# Altium PCB Codec_board_V0.PcbDoc
Units mm, origin at the board's own origin, x right, y up, seen from the top; angles counter-clockwise.
Board outline 73.53 x 102.49 mm, 2 copper layers (Top Layer, Bottom Layer); 116 components, 71 nets, 404 pads, 53 vias.
Unrouted connection lines stored in the file: 28.
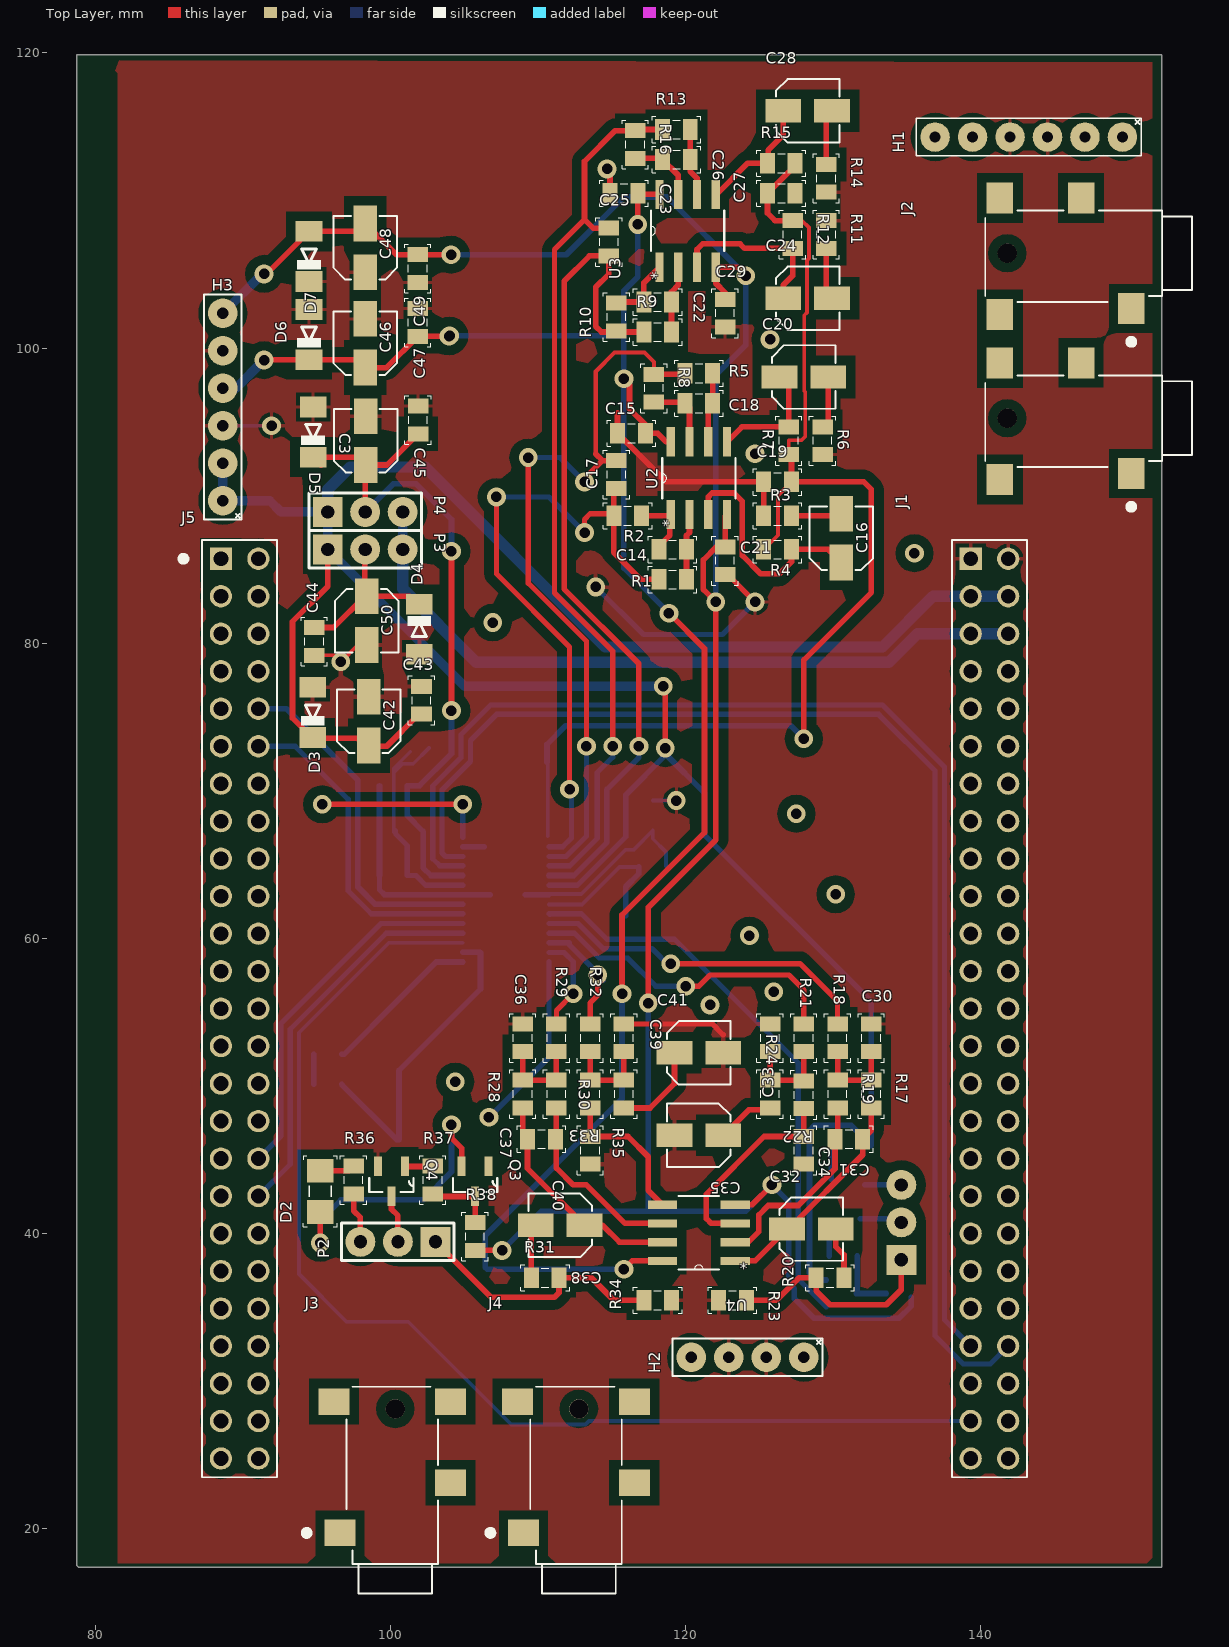
[diagram p0: Top Layer view]
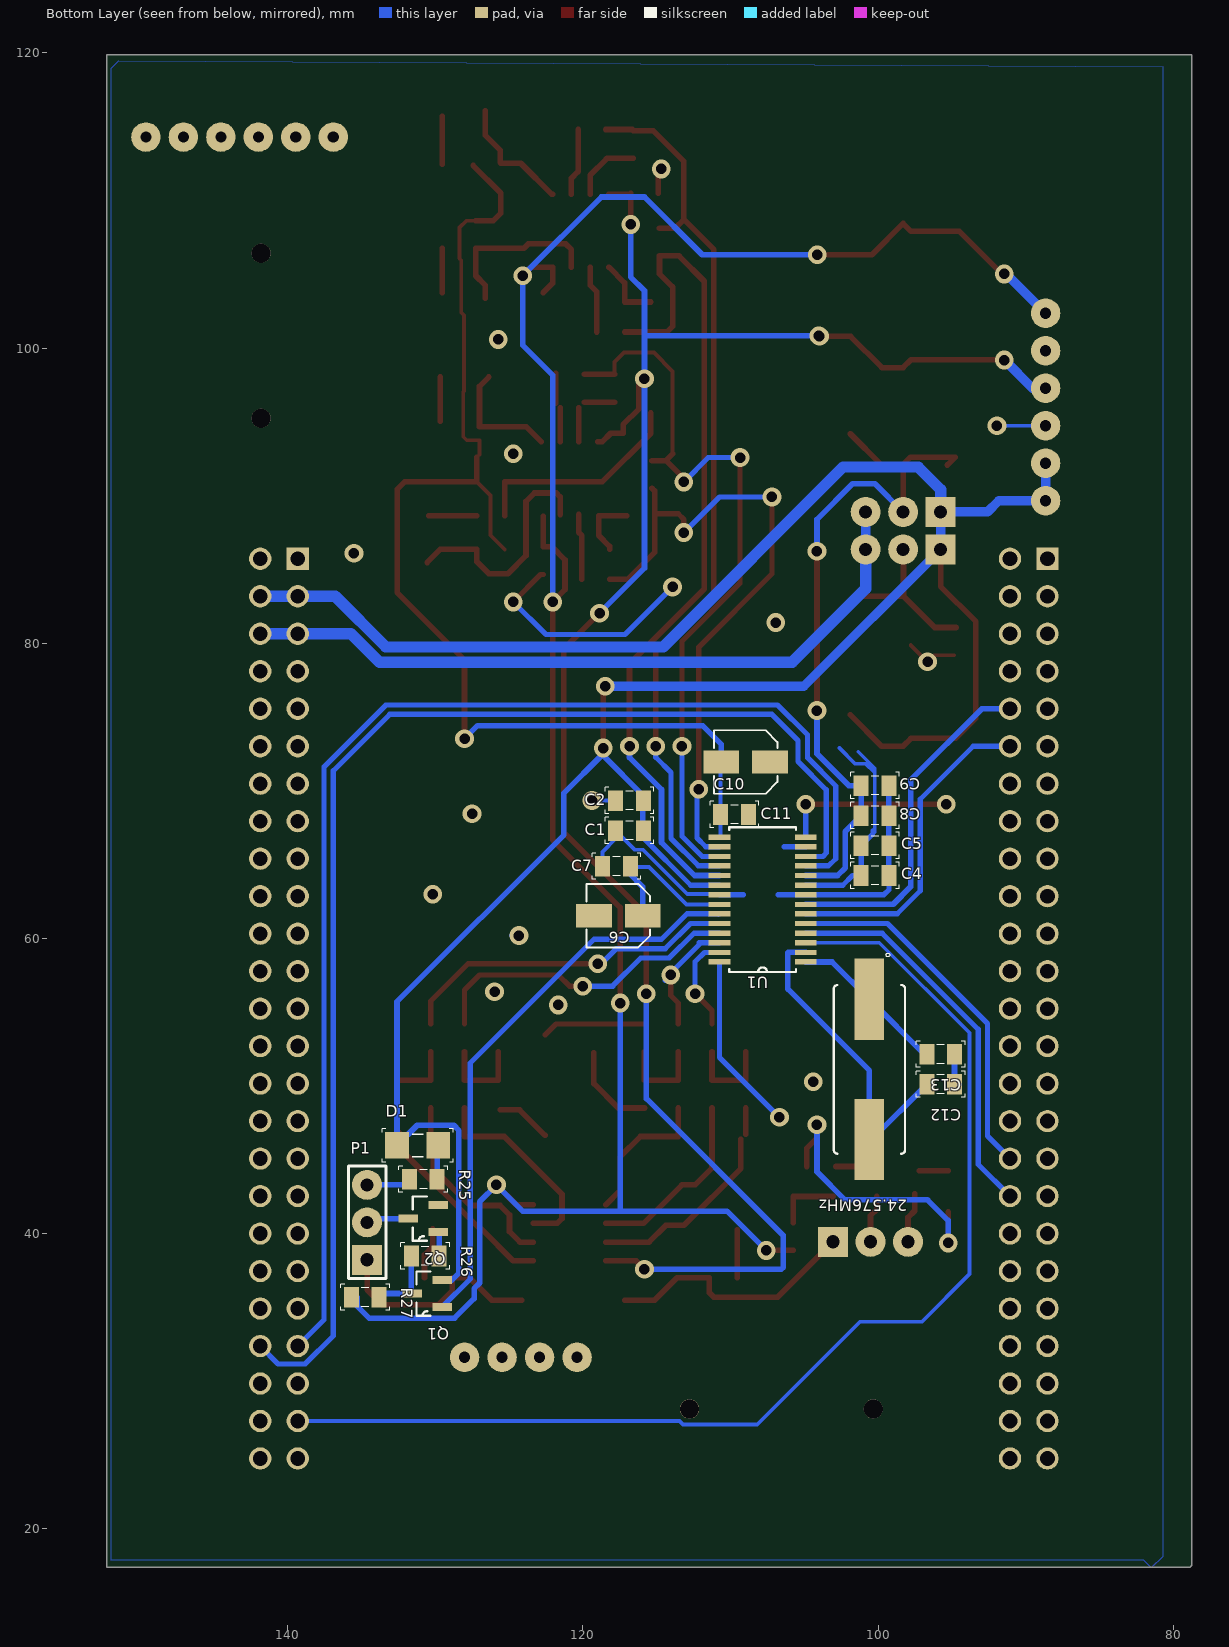
[diagram p1: Bottom Layer view, seen from below]

## Layer stack, top to bottom
Top Solder: solder mask 0.0102, Solder Resist, Dk 3.5
Top Layer: signal copper 0.0356
Dielectric 1: dielectric 0.32, FR-4, Dk 4.8
Bottom Layer: signal copper 0.0356
Bottom Solder: solder mask 0.0102, Solder Resist, Dk 3.5

## Board outline
78.74,17.526 78.867,17.399 152.273,17.399 152.273,119.888 78.74,119.888

## Design rules (kind name [scope] priority, off if disabled: settings)
Clearance [All] p1: gap=0.279 ignorepadtopadclearanceinfootprint=FALSE except(0: Arc-Hole Track-Hole SMDPad-Hole THPad-Hole Via-Hole Fill-Hole Poly-Hole Region-Hole Text-Hole; 0.635: Arc-Poly Track-Poly SMDPad-Poly THPad-Poly Via-Poly Fill-Poly Poly-Poly)
PolygonConnect [All] p1: connectstyle=Relief reliefconductorwidth=0.254 reliefentries=4 polygonreliefangle="90 Angle" airgapwidth=0.254
RoutingVias [All] p1: holewidth=0.711 width=1.27 viastyle="Through Hole" minholewidth=0.711 minwidth=1.27 maxholewidth=0.711 maxwidth=1.27
SilkToSilkClearance [All] p1 off: silktosilkclearance=0.254
SolderMaskExpansion [All] p1: expansion=0.102
Width [All] p1: maxlimit=0.762 minlimit=0.254 preferedwidth=0.381
29 further rules are at their usual default settings.

## Classes and differential pairs
component class Power: C3 C42 C43 C44 C45 C46 C47 C48 C49 C50 D3 D4 D5 D6 D7 H3 P3 P4
component class Output: C30 C31 C32 C33 C34 C35 C36 C37 C38 C39 C40 C41 D1 D2 H2 J3 J4 P1 P2 Q1 Q2 Q3 Q4 R17 R18 R19 R20 R21 R22 R23 R24 R25 R26 R27 R28 R29 R30 R31 R32 R33 R34 R35 R36 R37 R38 U4
component class Input: C14 C15 C16 C17 C18 C19 C20 C21 C22 C23 C24 C25 C26 C27 C28 C29 H1 J1 J2 R1 R2 R3 R4 R5 R6 R7 R8 R9 R10 R11 R12 R13 R14 R15 R16 U2 U3
component class Codec: 24.576MHz C1 C2 C4 C5 C6 C7 C8 C9 C10 C11 C12 C13 U1
component class Codec_board: J5

## Components (designator, comment, footprint, x,y, rotation, side; value= is the part's Value field where it differs from the comment)
24.576MHz "XTAL" XTAL_hc-49_smd 100.584,51.13 r270 bottom
C1 "0.1u" 0805_cap 116.84,67.31 r180 bottom
C2 "1u X7R" 0805_cap 116.84,69.342 r180 bottom
C3 "100u" "cap 4x5.4" 98.323,93.726 r90 top
C4 "0.1u" 0805_cap 100.203,64.262 r180 bottom
C5 "1u X7R" 0805_cap 100.203,66.294 r180 bottom
C6 "47u" "cap 4x5.4" 117.602,61.544 r0 bottom
C7 "0.1u" 0805_cap 117.729,64.897 r180 bottom
C8 "0.1u" 0805_cap 100.203,68.326 r0 bottom
C9 "1u X7R" 0805_cap 100.203,70.358 r0 bottom
C10 "0.1u" 0805_cap 109.728,68.402 r180 bottom
C11 "1u" "cap 4x5.4" 108.966,71.958 r0 bottom
C12 "39p C0G" 0805_cap 95.758,50.114 r0 bottom
C13 "39p C0G" 0805_cap 95.758,52.146 r0 bottom
C14 "470p C0G" 0805_cap 119.126,86.36 r0 top
C15 "0.01u X7R" 0805_cap 116.332,94.234 r0 top
C16 "10u" "cap 4x5.4" 130.556,87.122 r90 top
C17 "2700p C0G" 0805_cap 115.316,91.44 r90 top
C18 "470p C0G" 0805_cap 120.904,96.266 r0 top
C19 "0.01u X7R" 0805_cap 126.238,90.932 r0 top
C20 "10u" "cap 4x5.4" 128.016,98.044 r0 top
C21 "0.01u X7R" 0805_cap 122.682,85.598 r90 top
C22 "470p C0G" 0805_cap 118.11,103.124 r0 top
C23 "0.01u X7R" 0805_cap 115.824,110.49 r0 top
C24 "10u" "cap 4x5.4" 128.27,103.378 r0 top
C25 "2700p C0G" 0805_cap 114.808,107.188 r90 top
C26 "470p C0G" 0805_cap 119.38,112.776 r0 top
C27 "0.01u X7R" 0805_cap 126.492,110.49 r180 top
C28 "10u" "cap 4x5.4" 128.27,116.078 r0 top
C29 "0.01u X7R" 0805_cap 122.682,102.362 r90 top
C30 "2200p C0G" 0805_cap 132.588,53.264 r90 top
C31 "470p C0G" 0805_cap 131.064,46.406 r180 top
C32 "470u" "cap 4x5.4" 128.524,40.31 r0 top
C33 "6800p C0G" 0805_cap 125.73,53.264 r270 top
C34 "1500p C0G" 0805_cap 128.016,45.644 r90 top
C35 "22u" "cap 4x5.4" 120.904,46.66 r180 top
C36 "2200p C0G" 0805_cap 108.966,53.264 r90 top
C37 "470p C0G" 0805_cap 110.236,46.406 r0 top
C38 "470u" "cap 4x5.4" 111.506,40.564 r180 top
C39 "6800p C0G" 0805_cap 115.824,53.264 r270 top
C40 "1500p C0G" 0805_cap 113.538,45.644 r90 top
C41 "22u" "cap 4x5.4" 120.904,52.248 r0 top
C42 "100u" "cap 4x5.4" 98.531,74.728 r90 top
C43 "0.1u X7R" 0805_cap 102.108,76.136 r270 top
C44 "0.1u X7R" 0805_cap 94.844,80.125 r90 top
C45 "0.1u X7R" 0805_cap 101.879,95.135 r270 top
C46 "47u" "cap 4x5.4" 98.298,100.33 r90 top
C47 "0.1u X7R" 0805_cap 101.854,101.739 r270 top
C48 "47u" "cap 4x5.4" 98.298,106.795 r90 top
C49 "0.1u X7R" 0805_cap 101.854,105.387 r270 top
C50 "100u" "cap 4x5.4" 98.4,81.534 r270 top
D1 "LED_mute" 1206 131.191,45.974 r180 bottom
D2 "LED_mute" 1206 95.25,42.865 r90 top
D3 "6.8V" SOD-80 94.742,75.311 r90 top
D4 "6.8V" SOD-80 101.956,80.951 r270 top
D5 "6.8V" SOD-80 94.767,94.309 r90 top
D6 "24V" SOD-80 94.488,100.913 r90 top
D7 "24V" SOD-80 94.488,106.212 r90 top
H1 "arduino_header_6" header-6_male 149.606,114.3 r180 top
H2 "Audio_Out" header-4_male 124.206,31.623 r180 top
H3 "From_PowerHigh" header-6_male 88.646,89.662 r90 top
J1 "35RASMT2BHNTRX" SWITCHCRAFT_35RASMT2BHNTRX 146.304,95.25 r180 top
J2 "35RASMT2BHNTRX" SWITCHCRAFT_35RASMT2BHNTRX 146.304,106.426 r180 top
J3 "35RASMT2BHNTRX" SWITCHCRAFT_35RASMT2BHNTRX 100.33,23.622 r90 top
J4 "35RASMT2BHNTRX" SWITCHCRAFT_35RASMT2BHNTRX 112.776,23.622 r90 top
J5 "STM32F4DISCOVERY" STMICROELECTRONICS_STM32F4DISCOVERY_STM32F4DISCOVERY 88.519,85.725 r0 top locked
P1 "MuteSel" HDR1X3 134.62,38.227 r90 bottom
P2 "MuteSel" HDR1X3 103.048,39.446 r180 top
P3 "Vsel VD" HDR1X3 95.758,86.36 r0 top
P4 "Vsel VL" HDR1X3 95.758,88.9 r0 top
Q1 "MMUN2111LT1G" SOT-23 130.556,35.941 r0 bottom
Q2 "MMBT5551" SOT-23 130.81,41.021 r0 bottom
Q3 "MMUN2111LT1G" SOT-23 105.74,43.536 r270 top
Q4 "MMBT5551" SOT-23 100.076,43.536 r270 top
R1 "634" 0805 119.126,84.328 r0 top
R2 "90.9" 0805 116.078,88.646 r0 top
R3 "100k" 0805 126.238,88.646 r0 top
R4 "10k" 0805 126.238,86.36 r0 top
R5 "634" 0805 120.904,98.298 r0 top
R6 "100k" 0805 129.286,93.726 r270 top
R7 "10k" 0805 127,93.726 r270 top
R8 "90.9" 0805 117.856,97.282 r270 top
R9 "634" 0805 118.11,101.092 r0 top
R10 "90.9" 0805 115.316,102.108 r90 top
R11 "100k" 0805 129.54,107.696 r270 top
R12 "10k" 0805 127.254,107.696 r270 top
R13 "634" 0805 119.38,114.808 r0 top
R14 "100k" 0805 129.54,111.506 r270 top
R15 "10k" 0805 126.492,112.522 r0 top
R16 "90.9" 0805 116.586,113.792 r270 top
R17 "4.99k" 0805 132.588,49.454 r270 top
R18 "4.42k" 0805 130.302,53.264 r270 top
R19 "2.32k" 0805 130.302,49.454 r270 top
R20 "1.3k" 0805 129.794,37.008 r180 top
R21 "1.33k" 0805 128.016,53.264 r270 top
R22 "715" 0805 128.016,49.403 r270 top
R23 "47k" 0805 123.19,35.484 r0 top
R24 "1.5k" 0805 125.73,49.454 r90 top
R25 "1.2k" 0805 130.81,43.688 r180 bottom
R26 "2k" 0805 130.683,38.481 r180 bottom
R27 "10k" 0805 134.747,35.687 r180 bottom
R28 "4.99k" 0805 108.966,49.454 r270 top
R29 "4.42k" 0805 111.252,53.264 r270 top
R30 "2.32k" 0805 111.252,49.454 r270 top
R31 "1.3k" 0805 110.49,37.008 r0 top
R32 "1.33k" 0805 113.538,53.264 r270 top
R33 "715" 0805 113.538,49.454 r270 top
R34 "47k" 0805 118.11,35.484 r180 top
R35 "1.5k" 0805 115.824,49.454 r90 top
R36 "1.2k" 0805 97.511,43.637 r90 top
R37 "2k" 0805 102.87,43.637 r90 top
R38 "10k" 0805 105.74,39.802 r90 top
U1 "CS4272" TSSOP-28 107.823,62.636 r0 bottom
U2 "NE5532" SOIC-8 120.904,91.186 r90 top
U3 "NE5532" SOIC-8 120.142,107.95 r90 top
U4 "NE5532" SOIC-8 120.904,40.056 r180 top

## Footprints (in the part's own frame and the unit in brackets; to place one, negate y for a bottom-side part, rotate by r counter-clockwise, add the part's x,y. Pads: shape width x height; smd on the part's side, far side on the other; paste and mask are expansions set on the pad)
0805 [mil]
  rect 40x55 smd: 1(-37,0) 2(37,0)
  silkscreen extent -65,-35 65,35, body extent -41,-27 41,27, height 24
0805_cap [mil]
  rect 40x55 smd: 1(-37,0) 2(37,0)
  silkscreen extent -65,-35 65,35, body extent -41,-27 41,27, height 37
1206 [mm]
  rect 1.6x1.8 smd: 1(-1.4,0) 2(1.4,0)
  silkscreen extent -2.41,-1.14 2.42,1.14, body extent -1.65,-0.85 1.65,0.85, height 0.65
"cap 4x5.4" [mm]
  rect 2.42x1.58 smd: 1(-1.65,0) 2(1.65,0)
  silkscreen extent -2.15,-2.15 2.15,2.15, body extent -2.73,-2.25 2.77,2.25, height 5.5
HDR1X3 [mil] "Connector; Header; 3 Position"
  rect 80x80 hole 35: 1(0,0)
  round 80 hole 35: 2(100,0) 3(200,0)
  silkscreen extent -50,-50 250,50
header-4_male [mm]
  round 2 hole 0.762: 1(-3.81,0) 2(-1.27,0) 3(1.27,0) 4(3.81,0)
  silkscreen extent -5.08,-1.27 5.08,1.27, body extent -5.08,-1.27 5.08,1.27, height 8.6
header-6_male [mm]
  round 2 hole 0.762: 1(0,0) 2(2.54,0) 3(5.08,0) 4(7.62,0) 5(10.16,0) 6(12.7,0)
  silkscreen extent -1.27,-1.27 13.97,1.27, body extent -1.27,-1.27 13.97,1.27, height 8.6
SOD-80 [mm] "for diodes"
  rect 1.4x1.8 smd: A(1.7,0) C(-1.7,0)
  silkscreen extent -0.87,-0.79 0.5,0.79, body extent -1.85,-0.8 1.85,0.8, height 1.57
SOIC-8 [mil]
  rect 78x22 smd: 1(-97,75) 2(-97,25) 3(-97,-25) 4(-97,-75) 5(97,-75) 6(97,-25) 7(97,25) 8(97,75)
  silkscreen extent -54,-98 54,98, body extent -116,-96 116,96, height 65
SOT-23 [mil]
  rect 52x22 smd: 1(-40,36) 2(-40,-36) 3(40,0)
  silkscreen extent -9,-59 28,59, body extent -60,-61 58,61, height 57
STMICROELECTRONICS_STM32F4DISCOVERY_STM32F4DISCOVERY [mm]
  rect 1.508x1.508 hole 1: P1(0,0) P51(50.8,0)
  round 1.508 hole 1: P2(2.54,0) P3(0,-2.54) P4(2.54,-2.54) P5(0,-5.08) P6(2.54,-5.08) P7(0,-7.62) P8(2.54,-7.62) P9(0,-10.16) P10(2.54,-10.16) P11(0,-12.7) P12(2.54,-12.7) P13(0,-15.24) P14(2.54,-15.24) P15(0,-17.78) P16(2.54,-17.78) P17(0,-20.32) P18(2.54,-20.32) P19(0,-22.86) P20(2.54,-22.86) P21(0,-25.4) P22(2.54,-25.4) P23(0,-27.94) P24(2.54,-27.94) P25(0,-30.48) P26(2.54,-30.48) P27(0,-33.02) P28(2.54,-33.02) P29(0,-35.56) P30(2.54,-35.56) P31(0,-38.1) P32(2.54,-38.1) P33(0,-40.64) P34(2.54,-40.64) P35(0,-43.18) P36(2.54,-43.18) P37(0,-45.72) P38(2.54,-45.72) P39(0,-48.26) P40(2.54,-48.26) P41(0,-50.8) P42(2.54,-50.8) P43(0,-53.34) P44(2.54,-53.34) P45(0,-55.88) P46(2.54,-55.88) P47(0,-58.42) P48(2.54,-58.42) P49(0,-60.96) P50(2.54,-60.96) P52(53.34,0) P53(50.8,-2.54) P54(53.34,-2.54) P55(50.8,-5.08) P56(53.34,-5.08) P57(50.8,-7.62) P58(53.34,-7.62) P59(50.8,-10.16) P60(53.34,-10.16) P61(50.8,-12.7) P62(53.34,-12.7) P63(50.8,-15.24) P64(53.34,-15.24) P65(50.8,-17.78) P66(53.34,-17.78) P67(50.8,-20.32) P68(53.34,-20.32) P69(50.8,-22.86) P70(53.34,-22.86) P71(50.8,-25.4) P72(53.34,-25.4) P73(50.8,-27.94) P74(53.34,-27.94) P75(50.8,-30.48) P76(53.34,-30.48) P77(50.8,-33.02) P78(53.34,-33.02) P79(50.8,-35.56) P80(53.34,-35.56) P81(50.8,-38.1) P82(53.34,-38.1) P83(50.8,-40.64) P84(53.34,-40.64) P85(50.8,-43.18) P86(53.34,-43.18) P87(50.8,-45.72) P88(53.34,-45.72) P89(50.8,-48.26) P90(53.34,-48.26) P91(50.8,-50.8) P92(53.34,-50.8) P93(50.8,-53.34) P94(53.34,-53.34) P95(50.8,-55.88) P96(53.34,-55.88) P97(50.8,-58.42) P98(53.34,-58.42) P99(50.8,-60.96) P100(53.34,-60.96)
  silkscreen extent -2.74,-62.23 54.61,1.27, body extent -1.23,-63.39 54.57,1.65, height 8.5
SWITCHCRAFT_35RASMT2BHNTRX [mm]
  rect 1.8x2.1 smd: 1(-3.9,3.75) 2(5,4.15) 3(-0.5,-3.75) 10(5,-3.75)
  round 1.3 hole 1.3 unplated: None(4.5,0)
  silkscreen extent -8,-2.9 6,6.2, body extent -8.48,-4.5 10.52,4.5, height 5.1
TSSOP-28 [mil]
  rect 58x14 smd: 1(-115,166) 2(-115,141) 3(-115,115) 4(-115,90) 5(-115,64) 6(-115,38) 7(-115,13) 8(-115,-13) 9(-115,-38) 10(-115,-64) 11(-115,-90) 12(-115,-115) 13(-115,-141) 14(-115,-166) 15(115,-166) 16(115,-141) 17(115,-115) 18(115,-90) 19(115,-64) 20(115,-38) 21(115,-13) 22(115,13) 23(115,38) 24(115,64) 25(115,90) 26(115,115) 27(115,141) 28(115,166)
  silkscreen extent -89,-193 89,193, body extent -127,-177 127,177, height 44
XTAL_hc-49_smd [mm]
  rect 5.5x2 smd: 1(-4.75,0) 2(4.75,0)
  silkscreen extent -7.88,-2.41 5.72,2.41, body extent -5.81,-2.35 5.8,2.35, height 4.2

## Part data
24.576MHz: library part hc-49_smd, "Crystal 4MHz ?30ppm (Tol) ?50ppm (Stability) 20pF FUND 200Ohm 2-Pin HC-49/SDLF SMD T/R", Package="HC49SD Fox Electronics", Availability=Good, MF="Fox Electronics", MP=FOXSDLF/040, Price="0.34 USD", SnapEDA_Link=https://www.snapeda.com/symbols-footprints/FOXSDLF/040/Fox%20Electronics/view-part/?ref=snap
C1 C2 C4 C5 C7 C8 C9 C10 C12 C13 C14 C15 C17 C18 C19 C21 C22 C23 C25 C26 C27 C29 C30 C31 C33 C34 C36 C37 C39 C40 C43 C44 C45 C47 C49: library part Cap
C3 C6 C11 C16 C20 C24 C28 C32 C35 C38 C41 C42 C46 C48 C50: library part Cap_electrolytic
D1 D2: library part LED
D3 D4 D5 D6 D7: library part Stabilitron
H2: library part arduino_header_4
H3: library part arduino_header_6
J1 J2 J3 J4: library part "3.5mm jack stereo smd", "Conn 3.5MM Stereo Jack F 3 POS Solder RA SMD 3 Terminal 1 Port T/R", Package=None, Availability=Good, MF=Switchcraft, MP=35RASMT2BHNTRX, Price="0.84 USD", SnapEDA_Link=https://www.snapeda.com/parts/35RASMT2BHNTRX/Switchcraft%20Inc./view-part/?ref=snap
J5: "Development kit: ARM ST; pin strips, pin header; No.of", Package=None, Availability=Unavailable, MF=STMicroelectronics, MP=STM32F4DISCOVERY, Price=None, SnapEDA_Link=https://www.snapeda.com/parts/STM32F4DISCOVERY/STMicroelectronics/view-part/?ref=snap
P1 P2 P3 P4: library part "Header 3", "Header, 3-Pin", LatestRevisionDate=17-Jul-2002, LatestRevisionNote="Re-released for DXP Platform.", Publisher="Altium Limited"
R1 R2 R3 R4 R5 R6 R7 R8 R9 R10 R11 R12 R13 R14 R15 R16 R17 R18 R19 R20 R21 R22 R23 R24 R25 R26 R27 R28 R29 R30 R31 R32 R33 R34 R35 R36 R37 R38: library part "res my", "RES SMD  1/8W 0805", Package="0805 Yageo", Availability=Good, MF=Yageo, MP=AC0805JR-070RL, Price="0.01 USD"
U2 U3 U4: library part OPA2277

## Via types
v1: diameter 1.27, hole 0.711, Top Layer to Bottom Layer, 53 vias

## Nets (pads, with @x,y where several pads share a name; then routed paths per layer and width w, separated by ;. In a path a pad name is that pad's centre, name@x,y a point inside that pad or via, vN(x,y) a via of type N, cw(c..) or ccw(c..) an arc to the next point about the centre after c; other vN are vias at no path point)
+3.3V: J5.P55 J5.P56 P3.3 P4.3 | length 49.1
  Bottom Layer w0.635: P3.3 P4.3
  Bottom Layer w0.762: P3.3 100.838,83.693 105.816,78.715 133.781,78.715 135.712,80.645 J5.P55 J5.P56
+5V: C1.2 C2.2 C42.1 C43.2 D1.1 D2.1 D3.C H3.1 H3.2 J5.P53 J5.P54 P3.1 P4.1 Q1.2 Q3.2 U1.20 | length 202.6
  Top Layer w0.381: v1(95.25,39.37) D2.1 ; P3.1 95.758,83.85 93.372,81.464 93.372,74.929 94.742,73.559 97.765,73.559 98.298,73.026 99.757,73.026 C43.2@101.875,75.145 ; v1(104.14,47.371) 104.14,46.482 104.826,45.796 Q3.2 ; v1(118.491,77.089) 118.618,76.962 v1(118.618,72.898)
  Bottom Layer w0.356: U1.20 112.687,63.602 115.951,66.866 C1.2@115.951,67.183
  Bottom Layer w0.381: v1(95.25,39.37) 95.25,40.894 96.647,42.291 102.235,42.291 104.14,44.196 v1(104.14,47.371) ; C1.2@115.951,67.183 115.951,69.723 118.618,72.39 v1(118.618,72.898) ; v1@118.69,72.445 121.285,69.85 121.285,67.022 132.591,55.716 D1.1 131.221,47.344 128.751,47.344 128.397,46.99 128.397,37.338 128.88,36.855 Q1.2
  Bottom Layer w0.635: H3.2 H3.1 91.821,89.662 92.583,88.9 P4.1 P3.1 105.029,77.089 v1(118.491,77.089)
  Bottom Layer w0.762: P4.1 95.758,90.424 97.282,91.948 102.362,91.948 114.554,79.756 133.35,79.756 136.779,83.185 J5.P53 J5.P54
+18V: C15.2 C23.2 C46.1 C47.2 D6.C H3.4 U2.8 U3.8 U4.8 | length 130.6
  Top Layer w0.381: v1@91.44,99.213 D6.C 97.765,99.213 C46.1 99.735,98.68 C47.2 v1(103.974,100.799) v1(104.013,100.838) ; v1(115.697,56.261) 115.697,61.595 121.285,67.183 121.285,79.629 v1(118.872,82.042) ; v1(115.824,37.592) 116.383,38.151 U4.8 ; v1(115.824,97.917) 116.205,97.536 116.205,95.885 117.272,94.818 C15.2 118.11,94.234 118.694,93.65 U2.8 ; v1(116.764,108.382) C23.2 ; C23.2@116.84,110.414 U3.8
  Bottom Layer w0.381: v1(104.013,100.838) 115.824,100.838 ; v1(115.697,56.261) 115.697,49.149 106.426,39.878 106.426,37.719 106.553,37.592 v1(115.824,37.592) ; v1(116.764,108.382) 116.764,104.826 115.824,103.886 115.824,100.838 ; v1(118.872,82.042) 115.824,85.09 v1(115.824,97.917) 115.824,100.838
  Bottom Layer w0.635: H3.4 89.535,97.282 v1(91.44,99.187)
-18V: C21.2 C29.2 C48.2 C49.1 D7.A H3.6 R27.1 R38.1 U2.4 U3.4 U4.4 | length 162.9
  Top Layer w0.381: v1(91.44,105.029) 91.605,105.029 D7.A 97.765,107.912 C48.2 100.417,106.327 C49.1 v1(104.112,106.327) ; R38.1 v1(107.569,38.862) ; v1(117.475,55.626) 117.475,62.103 122.047,66.675 v1(122.047,82.804) 121.209,83.642 121.209,85.649 122.098,86.538 C21.2 U2.4@122.682,88.595 ; C29.2@122.682,103.759 122.047,104.394 U3.4 123.495,105.486 v1(124.079,104.902) ; U4.4 124.511,41.961 v1(125.857,43.307)
  Bottom Layer w0.381: H3.6 H3.6@88.773,102.362 ; v1(104.112,106.327) 111.915,106.327 115.824,110.236 118.745,110.236 v1(124.079,104.902) 124.079,100.203 122.047,98.171 v1(122.047,82.804) ; v1(107.569,38.862) 110.236,41.529 117.475,41.529 ; v1(117.475,55.626) 117.475,41.529 ; R27.1@135.306,35.687 135.306,35.103 134.48,34.277 128.685,34.277 127.368,35.594 127.368,36.282 126.987,36.663 126.987,42.177 v1(125.857,43.307) 124.079,41.529 117.475,41.529
  Bottom Layer w0.635: H3.6 v1@91.313,105.029
Codec_ctrl_SCL: J5.P93 U1.11 | length 86.7
  Bottom Layer w0.356: U1.11 103.353,64.922 102.87,65.405 102.87,70.331 104.788,72.249 104.788,73.8 106.807,75.819 133.35,75.819 137.541,71.628 137.541,34.163 J5.P93
Codec_ctrl_SDA: J5.P94 U1.12 | length 88.2
  Bottom Layer w0.356: U1.12 103.734,65.557 103.505,65.786 103.505,70.068 105.423,71.986 105.423,73.419 107.188,75.184 133.087,75.184 136.906,71.365 136.906,33.085 138.817,31.174 140.648,31.174 J5.P94
Codec_I2S_ADC: J5.P12 U1.6 | length 22.2
  Bottom Layer w0.356: J5.P12 93.548,73.025 97.142,69.431 97.142,63.232 98.703,61.671 U1.6
Codec_I2S_CLK: J5.P34 U1.5 | length 24.9
  Bottom Layer w0.356: J5.P34 92.583,46.609 92.583,54.229 99.365,61.011 U1.5
Codec_I2S_DAC: J5.P10 U1.7 | length 24
  Top Layer w0.381: J5.P10@91.059,75.184 J5.P10
  Bottom Layer w0.381: J5.P10 92.964,75.565 97.79,70.739 97.79,63.5 98.971,62.319 U1.7@104.902,62.319
Codec_I2S_LR: J5.P36 U1.4 | length 26.6
  Bottom Layer w0.356: J5.P36 93.218,44.704 93.218,53.848 99.72,60.35 U1.4
Codec_MCLK: J5.P97 U1.3 | length 79.8
  Bottom Layer w0.254: U1.3 99.912,59.715 93.802,53.606 93.802,37.262 97.028,34.036 101.219,34.036 108.189,27.066 113.214,27.066 113.453,27.305 J5.P97
Codec_NRST: J5.P95 U1.14 | length 11.8
  Top Layer w0.356: v1(95.377,69.088) v1(104.902,69.088)
  Bottom Layer w0.356: U1.14 v1(104.902,69.088)
GND: C1.1 C2.1 C3.2 C4.2 C5.2 C6.2 C7.1 C8.1 C9.1 C10.2 C11.1 C12.1 C13.1 C15.1 C19.1 C21.1 C23.1 C27.1 C29.1 C30.2 C33.1 C34.1 C35.2 C36.2 C39.1 C40.1 C41.2 C42.2 C43.1 C44.1 C45.1 C46.2 C47.1 C48.1 C49.2 C50.2 D3.A D4.A D5.A D6.A D7.C H1.3 H1.4 H2.2 H2.3 H3.3 H3.5 J5.P51 J5.P52 Q2.2 Q4.2 R3.1 R6.2 R11.1 R14.2 R23.1 R34.1 U1.8 U1.13 U1.21 | length 79.7
  Top Layer w0.254: C44.1 96.201,79.186 v1(96.647,78.74) C50.2@97.791,79.884
  Top Layer w0.356: C39.1 121.818,54.204 122.554,53.468 ; C21.1 122.86,84.658 v1(124.714,82.804) ; R3.1 C19.1
  Top Layer w0.381: v1@114.681,112.268 v1(114.681,112.141) 114.884,111.938 C23.1 ; 115.392,95.606 C15.1 118.694,90.932 C19.1
  Bottom Layer w0.254: H3.3 v1(91.948,94.742) ; U1.21 110.744,63.017 112.929,63.017 115.913,66.002 116.472,66.002 C1.1 117.78,66.751 118.669,65.862 C7.1 ; C2.1 v1(119.38,69.342)
  Bottom Layer w0.356: C4.2 99.263,63.297 99.593,62.967 U1.8 106.782,62.967 ; U1.13 106.375,66.218 ; 109.118,62.967 U1.21 ; v1(113.919,83.82) 117.145,80.594 122.504,80.594 v1(124.714,82.804)
  Bottom Layer w0.381: C12.1 C13.1 ; C4.2 C9.1
Net24.576MHz_1: 24.576MHz.1 C13.2 U1.1 | length 10.8
  Bottom Layer w0.381: C13.2 96.85,52.146 24.576MHz.1 103.111,58.407 U1.1@104.902,58.407
Net24.576MHz_2: 24.576MHz.2 C12.2 U1.2 | length 21.6
  Bottom Layer w0.381: C12.2 100.432,46.38 24.576MHz.2 100.584,51.054 106.108,56.578 106.108,59.032 106.073,59.068 U1.2@104.902,59.068
NetC6_1: C6.1 C7.2 U1.22 | length 10.8
  Bottom Layer w0.254: U1.22 112.979,62.306 115.519,64.846 C7.2@116.84,64.846
  Bottom Layer w0.381: C6.1 115.952,63.501 116.84,64.389 C7.2@116.84,64.846
NetC14_1: C14.1 R2.2 U2.1 | length 4.5
  Top Layer w0.381: R2.2 118.923,88.646 118.923,87.3 118.186,86.563 C14.1
NetC14_2: C14.2 R1.2 U2.2 | length 4.5
  Top Layer w0.381: R1.2 C14.2 120.066,87.3 120.269,87.503 U2.2
NetC16_1: C16.1 R4.2 U2.3 | length 16.3
  Top Layer w0.381: U2.3 121.539,89.916 121.806,90.183 123.283,90.183 123.85,89.615 123.85,85.937 125.078,84.709 126.365,84.709 127.178,85.522 R4.2 129.668,86.36 C16.1
NetC16_2: C16.2 H1.1 R3.2 | length 3.3
  Top Layer w0.381: R3.2 C16.2@130.43,88.646
NetC17_1: C17.1 R1.1 R2.1 U1.16 | length 45.2
  Top Layer w0.356: v1(107.188,89.916) 107.188,84.709 112.141,79.756 v1(112.141,70.104) ; v1(113.157,87.503) 113.157,88.392 113.538,88.773 R2.1@115.138,88.773
  Top Layer w0.381: C17.1 115.138,90.322 115.138,86.157 116.967,84.328 R1.1
  Bottom Layer w0.356: v1(107.188,89.916) 110.744,89.916 v1(113.157,87.503) ; U1.16 111.675,66.218 112.268,66.811 112.268,69.977 v1(112.141,70.104)
NetC17_2: C17.2 R5.1 R8.1 U1.17 | length 51.6
  Top Layer w0.279: 113.919,92.837 113.919,98.425 115.189,99.695 117.221,99.695 117.856,99.06 R8.1
  Top Layer w0.356: v1(109.347,92.583) 109.347,84.074 113.284,80.137 v1(113.284,73.025) ; v1(113.157,90.932) 113.157,91.161 114.376,92.38
  Top Layer w0.381: 113.919,92.837 114.376,92.38 C17.2 ; R8.1 R5.1@119.888,98.222
  Bottom Layer w0.356: v1(109.347,92.583) 111.506,92.583 v1(113.157,90.932) ; U1.17 111.912,65.557 113.284,66.929 v1(113.284,73.025)
NetC18_1: C18.1 R8.2 U2.7 | length 4.3
  Top Layer w0.381: R8.2 C18.1@119.888,96.342 ; U2.7 C18.1@120.269,95.961
NetC18_2: C18.2 R5.2 U2.6 | length 4.3
  Top Layer w0.381: U2.6 C18.2@121.539,95.961 ; C18.2 R5.2
NetC20_1: C20.1 R7.1 U2.5 | length 8.3
  Top Layer w0.381: U2.5 123.825,94.666 R7.1 127,97.41 C20.1
NetC20_2: C20.2 H1.2 J1.1 R6.1 | length 3
  Top Layer w0.381: R6.1@129.666,95.046 C20.2
NetC22_1: C22.1 R10.2 U3.1 | length 4.6
  Top Layer w0.381: R10.2@115.392,103.124 C22.1 117.17,104.419 U3.1
NetC22_2: C22.2 R9.2 U3.2 | length 4.6
  Top Layer w0.381: R9.2 C22.2 119.05,103.81 119.507,104.267 U3.2
NetC24_1: C24.1 R12.2 U3.3 | length 11.6
  Top Layer w0.381: U3.3 120.777,106.68 121.158,107.061 123.698,107.061 124.003,106.756 R12.2 127.254,104.902 126.62,104.268 C24.1
NetC24_2: C24.2 H1.6 R11.2 | length 3
  Top Layer w0.381: C24.2@129.54,103.758 R11.2
NetC25_1: C25.1 R9.1 R10.1 U1.19 | length 58.2
  Top Layer w0.381: v1(116.84,73.025) 116.84,78.613 111.773,83.68 111.773,104.534 113.487,106.248 C25.1 114.808,105.029 113.919,104.14 113.919,101.473 114.3,101.092 R9.1
  Bottom Layer w0.381: U1.19 112.431,64.262 114.668,66.499 114.668,70.091 116.84,72.263 v1(116.84,73.025)
NetC25_2: C25.2 R13.1 R16.1 U1.18 | length 60.8
  Top Layer w0.356: 113.157,108.712 111.125,106.68 111.125,83.412 115.062,79.475 v1(115.062,73.025)
  Top Layer w0.381: C25.2 113.741,108.128 113.157,108.712 113.157,112.649 115.24,114.732 R16.1 ; R16.1@116.662,114.808 R13.1
  Bottom Layer w0.356: U1.18 112.175,64.922 114.021,66.768 114.021,71.235 115.062,72.276 v1(115.062,73.025)
NetC26_1: C26.1 R16.2 U3.7 | length 4.7
  Top Layer w0.381: R16.2 118.364,112.852 C26.1 119.507,111.709 U3.7
NetC26_2: C26.2 R13.2 U3.6 | length 4.6
  Top Layer w0.381: R13.2 C26.2 120.32,111.963 120.777,111.506 U3.6
NetC28_1: C28.1 R15.1 U3.5 | length 8.4
  Top Layer w0.381: U3.5 122.098,110.414 124.206,112.522 R15.1 125.603,112.573 125.603,113.411 126.62,114.428 C28.1
NetC28_2: C28.2 H1.5 J2.1 R14.1 | length 3.3
  Top Layer w0.381: R14.1 C28.2@129.54,115.698
NetC30_1: C30.1 R17.1 R18.2 R19.1 | length 6.1
  Top Layer w0.381: R18.2 R19.1 R17.1 C30.1
NetC31_1: C31.1 C32.1 R17.2 U4.1 | length 15
  Top Layer w0.381: U4.1 124.715,38.151 C32.1 126.969,40.31 132.004,45.345 C31.1 132.588,46.99 R17.2
NetC31_2: C31.2 R19.2 U4.2 | length 13.4
  Top Layer w0.381: U4.2 124.257,39.421 124.968,40.132 124.968,41.275 125.603,41.91 127.635,41.91 130.124,44.399 C31.2 ; C31.2@130.302,46.584 R19.2
NetC32_2: C32.2 R20.1 | length 3.5
  Top Layer w0.381: C32.2 130.174,39.117 130.734,38.557 R20.1
NetC33_2: C33.2 R21.2 R22.1 R24.2 | length 6.1
  Top Layer w0.381: C33.2 R24.2 128.016,50.394 R21.2
NetC34_2: C34.2 R22.2 U4.3 | length 13.9
  Top Layer w0.381: U4.3 121.742,40.691 121.412,41.021 121.412,42.672 125.324,46.584 C34.2 R22.2@128.016,48.514
NetC35_1: C35.1 R24.1 | length 3.8
  Top Layer w0.381: C35.1 124.281,48.387 R24.1@125.603,48.387
NetC36_1: C36.1 R28.1 R29.2 R30.1 | length 6.1
  Top Layer w0.381: C36.1 R28.1 R30.1 R29.2
NetC37_1: C37.1 C38.1 R28.2 U4.7 | length 15
  Top Layer w0.381: C37.1@108.966,46.736 R28.2 ; C37.1 109.296,44.424 C38.1 114.376,40.564 115.519,39.421 U4.7
NetC37_2: C37.2 R30.2 U4.6 | length 12.8
  Top Layer w0.381: R30.2 111.252,44.45 112.395,43.307 113.284,43.307 115.9,40.691 U4.6
NetC38_2: C38.2 R31.1 | length 3.3
  Top Layer w0.381: R31.1 C38.2@109.55,40.258
NetC39_2: C39.2 R32.2 R33.1 R35.2 | length 6.1
  Top Layer w0.381: R32.2 R33.1 R35.2 C39.2
NetC40_2: C40.2 R33.2 U4.5 | length 10.1
  Top Layer w0.381: R33.2 C40.2 116.103,46.584 117.475,45.212 117.475,42.926 U4.5
NetC41_1: C41.1 R35.1 | length 6.2
  Top Layer w0.381: R35.1 117.602,48.514 119.254,50.166 C41.1
NetD1_2: D1.2 R25.2 | length 2.2
  Bottom Layer w0.381: R25.2 D1.2@129.87,45.895
NetD2_2: D2.2 R36.2 | length 1.9
  Top Layer w0.381: D2.2 R36.2@97.199,44.265
NetH2_1: H2.1 P1.1 R20.2 R23.2 | length 14.9
  Top Layer w0.381: R23.2 126.162,35.484 127.686,37.008 R20.2 128.854,36.119 129.794,35.179 133.604,35.179 134.62,36.195 P1.1
NetH2_4: H2.4 P2.1 R31.2 R34.2 | length 17.5
  Top Layer w0.381: P2.1 106.807,35.687 111.125,35.687 111.43,35.992 R31.2 113.614,37.008 115.138,35.484 R34.2
NetP1_2: P1.2 Q2.3 | length 2.5
  Bottom Layer w0.381: Q2.3 P1.2@134.366,41.021
NetP1_3: P1.3 R25.1 | length 2.5
  Bottom Layer w0.381: R25.1@132.131,43.307 P1.3
NetP2_2: P2.2 Q4.3 | length 3.3
  Top Layer w0.381: Q4.3 100.076,41.656 100.508,41.224 P2.2
NetP2_3: P2.3 R36.1 | length 3.4
  Top Layer w0.381: R36.1 97.511,41.554 97.968,41.097 P2.3
NetQ1_1: Q1.1 U1.23 | length 38.5
  Bottom Layer w0.254: U1.23 U1.23@110.82,61.595
  Bottom Layer w0.356: U1.23 112.952,61.671 114.679,59.944 119.253,59.944 127.635,51.562 127.635,36.932 Q1.1
NetQ1_3: Q1.3 R26.1 R27.2 | length 4.6
  Bottom Layer w0.381: Q1.3 Q1.3@131.674,35.941 ; R26.1 131.623,35.992 Q1.3@131.674,35.941 ; R27.2@133.604,35.941 Q1.3@131.674,35.941
NetQ2_1: Q2.1 R26.2 | length 1.6
  Bottom Layer w0.381: R26.2 Q2.1@129.743,40.056
NetQ3_1: Q3.1 U1.28 | length 12.2
  Bottom Layer w0.356: v1(106.68,47.879) 110.744,51.943 U1.28
NetQ3_3: Q3.3 R37.1 R38.2 | length 4.5
  Top Layer w0.381: R37.1@103.048,42.52 Q3.3 R38.2
NetQ4_1: Q4.1 R37.2 | length 1.9
  Top Layer w0.381: Q4.1 R37.2@102.845,44.552
NetR18_1: R18.1 U1.24 | length 23.6
  Top Layer w0.356: v1(118.999,58.293) 127.762,58.293 130.302,55.753 R18.1
  Bottom Layer w0.356: U1.24 112.714,61.011 114.416,59.309 117.729,59.309 118.999,58.039 v1(118.999,58.293)
NetR21_1: R21.1 U1.25 | length 21.8
  Top Layer w0.356: v1(120.015,56.769) 120.904,56.769 121.666,57.531 127,57.531 128.016,56.515 R21.1
  Bottom Layer w0.356: U1.25 112.477,60.35 114.153,58.674 116.078,58.674 117.983,56.769 v1(120.015,56.769)
NetR29_1: R29.1 U1.27 | length 6.6
  Top Layer w0.356: R29.1 111.252,55.118 v1(112.395,56.261)
  Bottom Layer w0.356: U1.27 111.76,59.055 112.395,58.42 v1(112.395,56.261)
NetR32_1: R32.1 U1.26 | length 8.3
  Top Layer w0.356: R32.1 113.538,55.626 114.046,56.134 v1(114.046,57.531)
  Bottom Layer w0.356: U1.26 112.116,59.715 112.116,59.597 v1@114.046,57.667 ; v1(114.046,57.531) v1@114.427,57.15
VCOM: C10.1 C11.2 C19.2 C27.2 R4.1 R7.2 R12.1 R15.2 U1.15 | length 79.6
  Top Layer w0.254: R4.1 126.263,87.325 126.263,90.018 C19.2 ; R7.2 127,93.751 127.867,93.751 128.105,93.989 128.105,97.03 128.05,97.086 128.05,102.233 128.236,102.42 128.236,105.957 128.359,106.08 128.359,108.166 127.889,108.636 R12.1
  Top Layer w0.381: R7.2@127.178,92.608 C19.2 132.08,90.932 132.588,90.424 132.588,83.439 128.016,78.867 v1(128.016,73.533) ; R12.1 126.06,108.636 125.552,109.144 C27.2 R15.2@127.432,112.37
  Bottom Layer w0.254: U1.15@110.668,66.929 C10.1 C11.2@110.668,71.906
  Bottom Layer w0.381: C11.2 110.616,73.151 111.887,74.422 127.127,74.422 v1(128.016,73.533)
VD: C4.1 C5.1 C44.2 C50.1 D4.C P3.2 U1.9 | length 32
  Top Layer w0.381: C44.2@94.717,81.065 96.154,81.065 C50.1@98.273,83.184 ; P3.2 98.273,86.335 C50.1@98.273,83.184 ; D4.C@101.829,82.651 101.296,83.184 C50.1@98.273,83.184
  Bottom Layer w0.254: 101.346,72.644 100.228,71.526 100.228,67.208 100.381,67.056 100.381,67.307 100.228,67.459 100.228,71.225 100.841,71.837 101.555,71.837 102.616,72.898
  Bottom Layer w0.356: 100.381,67.056 C5.1 C4.1 101.727,64.262 102.387,63.602 U1.9
VL: C3.1 C8.2 C9.2 C45.2 D5.C P4.2 U1.10 | length 48.5
  Top Layer w0.381: D5.C@95.3,92.076 D5.C 97.79,92.609 C3.1@98.298,92.101 ; P4.2@98.323,88.925 P4.2 C3.1@98.298,92.101 ; C45.2 99.76,92.076 C3.1 C3.1@98.298,92.101 ; v1(104.14,75.438) v1(104.14,86.233)
  Bottom Layer w0.381: P4.2 100.203,90.805 101.727,90.805 104.14,88.392 v1(104.14,86.233) ; v1(104.14,75.438) 104.14,72.517 101.981,70.358 C9.2 C8.2 102.222,67.246 102.222,64.783 102.743,64.262 U1.10
pads on no net: J1.2 J1.3 J1.10 J1.None J2.2 J2.3 J2.10 J2.None J3.1 J3.2 J3.3 J3.10 J3.None J4.1 J4.2 J4.3 J4.10 J4.None J5.P1 J5.P2 J5.P3 J5.P4 J5.P5 J5.P6 J5.P7 J5.P8 J5.P9 J5.P11 J5.P13 J5.P14 J5.P15 J5.P16 J5.P17 J5.P18 J5.P19 J5.P20 J5.P21 J5.P22 J5.P23 J5.P24 J5.P25 J5.P26 J5.P27 J5.P28 J5.P29 J5.P30 J5.P31 J5.P32 J5.P33 J5.P35 J5.P37 J5.P38 J5.P39 J5.P40 J5.P41 J5.P42 J5.P43 J5.P44 J5.P45 J5.P46 J5.P47 J5.P48 J5.P49 J5.P50 J5.P57 J5.P58 J5.P59 J5.P60 J5.P61 J5.P62 J5.P63 J5.P64 J5.P65 J5.P66 J5.P67 J5.P68 J5.P69 J5.P70 J5.P71 J5.P72 J5.P73 J5.P74 J5.P75 J5.P76 J5.P77 J5.P78 J5.P79 J5.P80 J5.P81 J5.P82 J5.P83 J5.P84 J5.P85 J5.P86 J5.P87 J5.P88 J5.P89 J5.P90 J5.P91 J5.P92 J5.P96 J5.P98 J5.P99 J5.P100
copper on no net: | length 1.4
  Top Layer w0.356: v1@121.412,55.753 v1(121.666,55.499) ; v1@124.587,92.837 v1(124.714,92.837)
  Bottom Layer w0.356: v1(124.333,60.198) v1@124.841,60.198 ; v1(130.175,62.992) v1@130.175,63.373
  other v1: 104.394,50.292 125.984,56.388 127.508,68.453 106.934,81.407 135.509,86.106 125.73,100.584

## Polygon pours and split planes (outlines as drawn)
GND on Top Layer "GND_L01_P008" (solid, pour order 8): 80.645,119.507 81.534,118.618 81.534,17.653 151.257,17.653 151.638,18.034 151.638,119.38
GND on Bottom Layer "GND_L02_P010" (solid, pour order 10): 80.718,119.078 80.718,18.113 81.48,17.351 81.988,17.859 151.965,17.859 151.965,118.951 151.457,119.459

## Silkscreen, mask and mechanical layers (free items; w line width, h text height)
outline:
  lines w0.076: 150.241,119.888 150.241,17.399 ; 80.772,119.888 82.804,119.888 ; 80.772,119.888 80.772,17.526 80.899,17.399 ; 80.772,119.888 78.74,119.888 78.74,17.526 78.867,17.399 80.899,17.399 ; 80.899,17.399 82.804,17.399 ; 82.804,17.399 148.209,17.399 ; 82.804,17.399 82.804,119.888 ; 82.804,119.888 148.209,119.888 ; 148.209,17.399 148.209,119.888 ; 148.209,17.399 150.241,17.399 ; 148.209,119.888 152.273,119.888 152.273,17.399 150.241,17.399

## Text inside footprints (layer, text, board x,y; h text height)
U2: Top Overlay "*" at 119.194,87.878 h0.76 r90; Mechanical 1 "*" at 119.197,87.883 h0.76 r90
U3: Top Overlay "*" at 118.432,104.642 h0.76 r90; Mechanical 1 "*" at 118.435,104.647 h0.76 r90
U4: Top Overlay "*" at 124.212,38.346 h0.76 r180; Mechanical 1 "*" at 124.207,38.349 h0.76 r180